# EAGLE board domus-silicea-board02-schematic (EAGLE 7.3.0)

Size 100 x 80 mm. Coordinates in mm from the lower left corner, seen from the top.
Outline: 0,0 100,0 100,80 0,80 0,0
Copper layers (1*16): Top 0.035mm / dielectric 1.5mm / Bottom 0.035mm
Design rules "default": minimum track width 10mil, minimum drill 24mil, track to track 8mil, track to pad 8mil, pad to pad 8mil, via to via 8mil, smd to smd 8mil, copper to edge 40mil, drill to drill 8mil, minimum pad ring 10mil, minimum via ring 8mil, stop-mask expansion 4mil, vias tented up to drill 0mil, thermal gap 10mil

## Footprints (pad centres in the part's own frame; a part is rotated, then mirrored left to right if it is on the bottom)
E2,5-6E = drill 0.813 pad 1.575: + -1.27,0 | drill 0.813 pad 1.575 octagon: - 1.27,0
1X02 = drill 1.016 long: 1 -1.27,0; 2 1.27,0
DO41-10 = drill 1.118: A 5.08,0; C -5.08,0
LED5MM = drill 0.813 octagon: A -1.27,0; K 1.27,0
1X18 = drill 1.016 long: 1 -21.59,0; 2 -19.05,0; 3 -16.51,0; 4 -13.97,0; 5 -11.43,0; 6 -8.89,0; 7 -6.35,0; 8 -3.81,0; 9 -1.27,0; 10 1.27,0; 11 3.81,0; 12 6.35,0; 13 8.89,0; 14 11.43,0; 15 13.97,0; 16 16.51,0; 17 19.05,0; 18 21.59,0
ARDUINO-PRO-MINI = drill 1: J1.1 -15.24,6.35; J1.2 -15.24,3.81; J1.3 -15.24,1.27; J1.4 -15.24,-1.27; J1.5 -15.24,-3.81; J1.6 -15.24,-6.35; J2.1 -1.27,5.08; J2.2 -3.81,5.08; J3.1 15.24,0; J3.2 15.24,2.54; J3.3 15.24,5.08; J6.1 -12.7,7.62; J6.2 -10.16,7.62; J6.3 -7.62,7.62; J6.4 -5.08,7.62; J6.5 -2.54,7.62; J6.6 0,7.62; J6.7 2.54,7.62; J6.8 5.08,7.62; J6.9 7.62,7.62; J6.10 10.16,7.62; J6.11 12.7,7.62; J6.12 15.24,7.62; J7.1 15.24,-7.62; J7.2 12.7,-7.62; J7.3 10.16,-7.62; J7.4 7.62,-7.62; J7.5 5.08,-7.62; J7.6 2.54,-7.62; J7.7 0,-7.62; J7.8 -2.54,-7.62; J7.9 -5.08,-7.62; J7.10 -7.62,-7.62; J7.11 -10.16,-7.62; J7.12 -12.7,-7.62
WIRELESS-NRF24L01 = drill 1 square: 1 -12.7,6.35 | drill 1: 2 -10.16,6.35; 3 -12.7,3.81; 4 -10.16,3.81; 5 -12.7,1.27; 6 -10.16,1.27; 7 -12.7,-1.27; 8 -10.16,-1.27
WIRELESS-WIFI-ESP-01 = drill 1 square: A1 -8.89,3.81; D1 -8.89,-3.81 | drill 1: A2 -11.43,3.81; B1 -8.89,1.27; B2 -11.43,1.27; C1 -8.89,-1.27; C2 -11.43,-1.27; D2 -11.43,-3.81
MOTION-PIR-HC-SR501 = drill 1 square: 1 -2.54,-10.16; 4 -14.224,10 | drill 1: 2 0,-10.16; 3 2.54,-10.16; 5 -14.224,7.46; 6 -14.224,4.92 | hole 1.8: -14.1,0; 14.1,0
TSOP38238 = drill 1 square: 1 2.54,-2.54 | drill 1: 2 0,-2.54; 3 -2.54,-2.54
DHT = drill 1 square: 1 3.81,-1 | drill 1: 2 1.27,-1; 3 -1.27,-1; 4 -3.81,-1
2,54/1,0 = drill 1.016 pad 2.54 octagon: 1 0,0
TO92-EBC = drill 0.813 long: B 0,-1.27; C -2.54,-1.27; E 2.54,-1.27
0204/7 = drill 0.813 octagon: 1 -3.81,0; 2 3.81,0
SJ = smd 1.168 x 1.6: 1 -0.762,0; 2 0.762,0
22-23-2031 = drill 1 long: 1 -2.54,0; 2 0,0; 3 2.54,0
87758-0816 = drill 0.9 pad 1.27: 1 -3,-1; 2 -3,1; 3 -1,-1; 4 -1,1; 5 1,-1; 6 1,1; 7 3,-1; 8 3,1

## Placement (x,y rotation side)
C1  [E2,5-6E]  -69.85,66.04 0 top  (outside the outline)
CON2  REED  [1X02]  -67.31,55.88 0 top  (outside the outline)
D1  1N4004  [DO41-10]  -19.05,66.04 0 top  (outside the outline)
IRLED1  [LED5MM]  -35.56,66.04 0 top  (outside the outline)
IRLED2  [LED5MM]  -49.53,66.04 0 top  (outside the outline)
JP1  [1X18]  24.13,26.67 0 top
JP2  [1X18]  24.13,2.54 0 top
LED1  [LED5MM]  -60.96,66.04 0 top  (outside the outline)
M1  ARDUINO-PRO-MINI-3.3V  [ARDUINO-PRO-MINI]  25.4,15.24 0 top
M2  WIRELESS-NRF24L01  [WIRELESS-NRF24L01]  34.29,16.51 180 top
M3  WIRELESS-WIFI-ESP-01  [WIRELESS-WIFI-ESP-01]  15.24,16.51 0 top
M4  MOTION-PIR-HC-SR501  [MOTION-PIR-HC-SR501]  -29.21,15.24 0 top  (outside the outline)
M5  TSOP38238  [TSOP38238]  -39.37,57.15 0 top  (outside the outline)
M6  DHT  [DHT]  -19.05,57.15 0 top  (outside the outline)
PAD1  [2,54/1,0]  -76.2,64.77 0 top  (outside the outline)
PAD2  [2,54/1,0]  -16.51,71.12 0 top  (outside the outline)
PAD3  [2,54/1,0]  -22.86,71.12 0 top  (outside the outline)
PAD4  [2,54/1,0]  -29.21,71.12 0 top  (outside the outline)
PAD5  [2,54/1,0]  -35.56,71.12 0 top  (outside the outline)
PAD6  [2,54/1,0]  -41.91,71.12 0 top  (outside the outline)
PAD7  [2,54/1,0]  -48.26,71.12 0 top  (outside the outline)
PAD8  D3  [2,54/1,0]  -54.61,71.12 0 top  (outside the outline)
Q1  BC487  [TO92-EBC]  -60.96,57.15 0 top  (outside the outline)
R1  220  [0204/7]  -17.78,76.2 0 top  (outside the outline)
R2  0  [0204/7]  -27.94,76.2 0 top  (outside the outline)
R3  10K  [0204/7]  -38.1,76.2 0 top  (outside the outline)
R4  10K  [0204/7]  -48.26,76.2 0 top  (outside the outline)
R5  1M  [0204/7]  -58.42,76.2 0 top  (outside the outline)
R6  330  [0204/7]  -68.58,76.2 0 top  (outside the outline)
SJ1  PIR_H  [SJ]  -58.42,71.12 0 top  (outside the outline)
SJ2  PIR_L  [SJ]  -63.5,71.12 0 top  (outside the outline)
SJ3  +3V3  [SJ]  -68.58,71.12 0 top  (outside the outline)
SJ4  +5V  [SJ]  -73.66,71.12 0 top  (outside the outline)
X1  POWER  [22-23-2031]  -29.21,57.15 0 top  (outside the outline)
X2  87758-0816  [87758-0816]  -52.07,55.88 0 top  (outside the outline)

## Library data of the parts
C1 = rcl
CON2 JP1 JP2 = pinhead
D1 = diode
IRLED1 IRLED2 LED1 = led
M1-M3 = diy-modules
M4-M6 = domus-silicea
PAD1-PAD8 = wirepad
Q1 = transistor-npn
R1-R6 = resistor
SJ1-SJ4 = jumper
X1 = con-molex; MF: MOLEX; MPN: POWER; OC_FARNELL: 1462950; OC_NEWARK: 30C0862
X2 = con-molex; MF: MOLEX; MPN: 87758-0816; OC_FARNELL: 7472331; OC_NEWARK: 59J1556

## Nets
+3V3: M1.J6.4 M2.2 M3.B2 M3.D2 M4.6 M5.3 M6.1 PAD2.1 R2.2 R3.2 R4.1 R5.1 SJ1.1 SJ3.2 X1.2
+5V: M1.J6.1 M4.3 PAD1.1 SJ4.2 X1.1
A0: M1.J6.8 PAD4.1
A1: M1.J6.7 PAD5.1
A2: M1.J6.6 PAD6.1
A3: M1.J6.5 PAD7.1
D3: M1.J7.7 PAD8.1
DHT: M1.J7.2 M6.2 R4.2
ESP_RX: M1.J7.12 M3.D1
ESP_TX: M1.J7.11 M3.A2
GND: C1.- CON2.2 LED1.K M1.J6.2 M1.J7.9 M2.1 M3.A1 M4.1 M4.4 M5.2 M6.4 PAD3.1 Q1.E SJ2.1 X1.3
IR_RX: M1.J7.3 M5.1
IR_TX: M1.J7.4 R1.1
LED: M1.J7.6 R6.2
N24_CE: M1.J7.1 M2.3
N24_CSN: M1.J6.12 M2.4
N24_MISO: M1.J6.10 M2.7
N24_MOSI: M1.J6.11 M2.6
N24_SCK: M1.J6.9 M2.5
N$1: IRLED1.K IRLED2.K Q1.C
N$2: IRLED1.A IRLED2.A R2.1
N$3: Q1.B R1.2
N$4: C1.+ SJ3.1 SJ4.1
N$5: M4.5 SJ1.2 SJ2.2
N$6: LED1.A R6.1
PIR: M1.J7.8 M4.2 R3.1
REED: CON2.1 M1.J7.5 R5.2

## Tracks (layer width: path | path; a pad name or v marks a point on that pad's centre or on a via)
+3V3  (14 unrouted)
+5V  (4 unrouted)
A0  (1 unrouted)
A1  (1 unrouted)
A2  (1 unrouted)
A3  (1 unrouted)
D3  (1 unrouted)
DHT  (2 unrouted)
ESP_RX  (1 unrouted)
ESP_TX  (1 unrouted)
GND  (14 unrouted)
IR_RX  (1 unrouted)
IR_TX  (1 unrouted)
LED  (1 unrouted)
N24_CE  (1 unrouted)
N24_CSN  (1 unrouted)
N24_MISO  (1 unrouted)
N24_MOSI  (1 unrouted)
N24_SCK  (1 unrouted)
N$1  (2 unrouted)
N$2  (2 unrouted)
N$3  (1 unrouted)
N$4  (2 unrouted)
N$5  (2 unrouted)
N$6  (1 unrouted)
PIR  (2 unrouted)
REED  (2 unrouted)
(copper drawn outside any net)
  shapes: Bottom area x1